# EAGLE board CT_schematic (EAGLE 7.6.0)

Size 100 x 80 mm. Coordinates in mm from the lower left corner, seen from the top.
Outline: 0,0 100,0 100,80 0,80 0,0
Copper layers (1*16): Top 0.035mm / dielectric 1.5mm / Bottom 0.035mm
Design rules "default": minimum track width 10mil, minimum drill 24mil, track to track 8mil, track to pad 8mil, pad to pad 8mil, via to via 8mil, smd to smd 8mil, copper to edge 40mil, drill to drill 8mil, minimum pad ring 10mil, minimum via ring 8mil, stop-mask expansion 4mil, vias tented up to drill 0mil, thermal gap 10mil

## Footprints (pad centres in the part's own frame; a part is rotated, then mirrored left to right if it is on the bottom)
C0603 = smd 0.8 x 0.8: 1 -0.762,0; 2 0.762,0
C0402 = smd 0.5 x 0.5: 1 -0.508,0; 2 0.508,0
C0805 = smd 1.2 x 1.3: 1 -1.016,0; 2 1.016,0
C1206 = smd 1.3 x 1.6: 1 -1.524,0; 2 1.524,0
DR1040 = smd 1.6 x 3.2: 1 -4.458,0; 2 4.458,0
R0603 = smd 0.8 x 0.8: 1 -0.762,0; 2 0.762,0
LQFP144 = smd 0.35 x 1.35: 1 -8.75,-10.625; 2 -8.25,-10.625; 3 -7.75,-10.625; 4 -7.25,-10.625; 5 -6.75,-10.625; 6 -6.25,-10.625; 7 -5.75,-10.625; 8 -5.25,-10.625; 9 -4.75,-10.625; 10 -4.25,-10.625; 11 -3.75,-10.625; 12 -3.25,-10.625; 13 -2.75,-10.62; 14 -2.25,-10.625; 15 -1.75,-10.625; 16 -1.25,-10.625; 17 -0.75,-10.625; 18 -0.25,-10.625; 19 0.25,-10.625; 20 0.75,-10.625; 21 1.25,-10.625; 22 1.75,-10.625; 23 2.25,-10.625; 24 2.75,-10.62; 25 3.25,-10.625; 26 3.75,-10.625; 27 4.25,-10.625; 28 4.75,-10.625; 29 5.25,-10.625; 30 5.75,-10.625; 31 6.25,-10.625; 32 6.75,-10.625; 33 7.25,-10.625; 34 7.75,-10.625; 35 8.25,-10.625; 36 8.75,-10.625; 73 8.75,10.625; 74 8.25,10.625; 75 7.75,10.625; 76 7.25,10.625; 77 6.75,10.625; 78 6.25,10.625; 79 5.75,10.625; 80 5.25,10.625; 81 4.75,10.625; 82 4.25,10.625; 83 3.75,10.625; 84 3.25,10.625; 85 2.75,10.625; 86 2.25,10.625; 87 1.75,10.625; 88 1.25,10.625; 89 0.75,10.625; 90 0.25,10.625; 91 -0.25,10.625; 92 -0.75,10.625; 93 -1.25,10.625; 94 -1.75,10.625; 95 -2.25,10.625; 96 -2.75,10.625; 97 -3.25,10.625; 98 -3.75,10.625; 99 -4.25,10.625; 100 -4.75,10.625; 101 -5.25,10.625; 102 -5.75,10.625; 103 -6.25,10.625; 104 -6.75,10.625; 105 -7.25,10.625; 106 -7.75,10.625; 107 -8.25,10.625; 108 -8.75,10.625 | smd 1.35 x 0.35: 37 10.625,-8.75; 38 10.625,-8.25; 39 10.625,-7.75; 40 10.625,-7.25; 41 10.625,-6.75; 42 10.625,-6.25; 43 10.625,-5.75; 44 10.625,-5.25; 45 10.625,-4.75; 46 10.625,-4.25; 47 10.625,-3.75; 48 10.625,-3.25; 49 10.625,-2.75; 50 10.625,-2.25; 51 10.625,-1.75; 52 10.625,-1.25; 53 10.625,-0.75; 54 10.625,-0.25; 55 10.625,0.25; 56 10.625,0.75; 57 10.625,1.25; 58 10.625,1.75; 59 10.625,2.25; 60 10.625,2.75; 61 10.625,3.25; 62 10.625,3.75; 63 10.625,4.25; 64 10.625,4.75; 65 10.625,5.25; 66 10.625,5.75; 67 10.625,6.25; 68 10.625,6.75; 69 10.625,7.25; 70 10.625,7.75; 71 10.625,8.25; 72 10.625,8.75; 109 -10.625,8.75; 110 -10.625,8.25; 111 -10.625,7.75; 112 -10.625,7.25; 113 -10.625,6.75; 114 -10.625,6.25; 115 -10.625,5.75; 116 -10.625,5.25; 117 -10.625,4.75; 118 -10.625,4.25; 119 -10.625,3.75; 120 -10.625,3.25; 121 -10.625,2.75; 122 -10.625,2.25; 123 -10.625,1.75; 124 -10.625,1.25; 125 -10.625,0.75; 126 -10.625,0.25; 127 -10.625,-0.25; 128 -10.625,-0.75; 129 -10.625,-1.25; 130 -10.625,-1.75; 131 -10.625,-2.25; 132 -10.625,-2.75; 133 -10.625,-3.25; 134 -10.625,-3.75; 135 -10.625,-4.25; 136 -10.625,-4.75; 137 -10.625,-5.25; 138 -10.625,-5.75; 139 -10.625,-6.25; 140 -10.625,-6.75; 141 -10.625,-7.25; 142 -10.625,-7.75; 143 -10.625,-8.25; 144 -10.625,-8.75
SOIC-8 = smd 1.6 x 0.6: 1 -2.7,1.905 | smd 1.55 x 0.6: 2 -2.7,0.635; 3 -2.7,-0.635; 4 -2.7,-1.905; 5 2.7,-1.905; 6 2.7,-0.635; 7 2.7,0.635; 8 2.7,1.905
SAMTEC_FTSH-105-01-L-DV-K = smd 0.762 x 2.794: 1 -2.54,-2.032; 2 -2.54,2.032; 3 -1.27,-2.032; 4 -1.27,2.032; 5 0,-2.032; 6 0,2.032; 7 1.27,-2.032; 8 1.27,2.032; 9 2.54,-2.032; 10 2.54,2.032
LGA-16 = smd 1.5 x 0.4: 1 -2.1,0.975; 2 -2.1,0.325; 3 -2.1,-0.325; 4 -2.1,-0.975; 9 2.1,-0.975; 10 2.1,-0.325; 11 2.1,0.325; 12 2.1,0.975 | smd 0.4 x 1.5: 5 -0.975,-2.1; 6 -0.325,-2.1; 7 0.325,-2.1; 8 0.975,-2.1; 13 0.975,2.1; 14 0.325,2.1; 15 -0.325,2.1; 16 -0.975,2.1
TDFN-8/6MM = smd 0.3 x 0.75: 1 0,0; 2 0.5,0; 3 1,0; 4 1.5,0; 5 1.5,3; 6 1,3; 7 0.5,3; 8 0,3
S25FL128SDSMFI000 = smd 0.5 x 1.6: 1 0,0; 2 1.27,0; 3 2.54,0; 4 3.81,0; 5 5.08,0; 6 6.35,0; 7 7.62,0; 8 8.89,0; 9 8.89,8.9; 10 7.62,8.9; 11 6.35,8.9; 12 5.08,8.9; 13 3.81,8.9; 14 2.54,8.9; 15 1.27,8.9; 16 0,8.9
SSOP-28 = smd 1.5 x 0.4: 1 -3.625,4.225; 2 -3.625,3.575; 3 -3.625,2.925; 4 -3.625,2.275; 5 -3.625,1.625; 6 -3.625,0.975; 7 -3.625,0.325; 8 -3.625,-0.325; 9 -3.625,-0.975; 10 -3.625,-1.625; 11 -3.625,-2.275; 12 -3.625,-2.925; 13 -3.625,-3.575; 14 -3.625,-4.225; 15 3.625,-4.225; 16 3.625,-3.575; 17 3.625,-2.925; 18 3.625,-2.275; 19 3.625,-1.625; 20 3.625,-0.975; 21 3.625,-0.325; 22 3.625,0.325; 23 3.625,0.975; 24 3.625,1.625; 25 3.625,2.275; 26 3.625,2.925; 27 3.625,3.575; 28 3.625,4.225
HTSS-105-01-G-D = drill 1 pad 1.8 square: 1 0,0 | drill 1 pad 1.8: 2 0,2.54; 3 2.54,0; 4 2.54,2.54; 5 5.08,0; 6 5.08,2.54; 7 7.62,0; 8 7.62,2.54; 9 10.16,0; 10 10.16,2.54
FCI_10118193-0001LF = smd 0.4 x 1.35: 1 -1.3,2.675; 2 -0.65,2.675; 3 0,2.675; 4 0.65,2.675; 5 1.3,2.675 | smd 1.6 x 1.4: 6 -3.2,2.45; 7 3.2,2.45 | smd 1.9 x 1.9: 8 -1.2,0; 9 1.2,0 | hole 0.5: -3.3,0; 3.3,0
SOT143B = smd 1 x 0.7: 1 -0.75,-1 | smd 0.6 x 0.7: 2 0.95,-1; 3 0.95,1; 4 -0.95,1
ASEK = smd 1.4 x 1: 1 -1.1,-0.8; 2 1.1,-0.8; 3 1.1,0.8; 4 -1.1,0.8
ASFL1 = smd 1.7 x 1.5: 1 -1.27,-1.1; 2 1.27,-1.1; 3 1.27,1.1; 4 -1.27,1.1
TSOT-23-5 = smd 1.3 x 0.62: 1 -1.31,0.95; 2 -1.31,0; 3 -1.31,-0.95; 4 1.31,-0.95; 5 1.31,0.95
DFN8_2X3MC = smd 0.813 x 0.305: 1 -1.398,0.75; 2 -1.398,0.25; 3 -1.398,-0.25; 4 -1.398,-0.75; 5 1.398,-0.75; 6 1.398,-0.25; 7 1.398,0.25; 8 1.398,0.75 | smd 1.753 x 1.549: 9 0,0
JST-2-SMD = smd 1 x 4.6: 1 -1,-3.7; 2 1,-3.7 | smd 1.6 x 3.4: NC1 -3.4,1.5; NC2 3.4,1.5
SON-6 = smd 0.55 x 0.3: 1 -0.355,0.5 | smd 0.52 x 0.3: 2 -0.37,0; 3 -0.37,-0.5; 4 0.37,-0.5; 5 0.37,0; 6 0.37,0.5
SW_4-1437565-2 = smd 1.4 x 2.1: 1 -2.23,4.55; 2 -2.23,-4.55; 3 2.23,4.55; 4 2.23,-4.55
LGM67K-G1J2-24-Z = smd 0.8 x 1.4: A -2,0; C 0,0
NC7SZ125M5X = smd 1.3 x 0.7: 1 -1.3,0.95; 2 -1.3,0; 3 -1.3,-0.95; 4 1.3,-0.95; 5 1.3,0.95

## Placement (x,y rotation side)
C1  1e-06  [C0603]  -46.99,71.12 0 top  (outside the outline)
C2  1e-07  [C0603]  -50.8,71.12 0 top  (outside the outline)
C3  1e-07  [C0603]  -54.61,71.12 0 top  (outside the outline)
C4  1e-07  [C0603]  -58.42,71.12 0 top  (outside the outline)
C5  1e-07  [C0603]  -62.23,71.12 0 top  (outside the outline)
C6  1e-07  [C0603]  -66.04,71.12 0 top  (outside the outline)
C7  1e-07  [C0603]  -69.85,71.12 0 top  (outside the outline)
C8  1e-07  [C0603]  -73.66,71.12 0 top  (outside the outline)
C9  1e-07  [C0603]  -77.47,71.12 0 top  (outside the outline)
C10  1e-07  [C0603]  -15.24,76.2 0 top  (outside the outline)
C11  1e-07  [C0603]  -19.05,76.2 0 top  (outside the outline)
C12  1e-07  [C0603]  -22.86,76.2 0 top  (outside the outline)
C13  1e-07  [C0603]  -26.67,76.2 0 top  (outside the outline)
C14  4.7e-06  [C0603]  -39.37,71.12 0 top  (outside the outline)
C15  1e-07  [C0603]  -30.48,76.2 0 top  (outside the outline)
C16  1e-07  [C0603]  -34.29,76.2 0 top  (outside the outline)
C17  1e-07  [C0603]  -38.1,76.2 0 top  (outside the outline)
C18  1e-08  [C0603]  -41.91,76.2 0 top  (outside the outline)
C19  1e-06  [C0603]  -45.72,76.2 0 top  (outside the outline)
C20  1e-08  [C0402]  -22.86,81.28 0 top  (outside the outline)
C21  1e-07  [C0402]  -26.67,81.28 0 top  (outside the outline)
C22  1e-08  [C0402]  -30.48,81.28 0 top  (outside the outline)
C23  1e-08  [C0402]  -34.29,81.28 0 top  (outside the outline)
C24  1e-08  [C0402]  -38.1,81.28 0 top  (outside the outline)
C25  4.7e-07  [C0603]  -43.18,71.12 0 top  (outside the outline)
C26  1e-08  [C0402]  -41.91,81.28 0 top  (outside the outline)
C27  1e-06  [C0603]  -49.53,76.2 0 top  (outside the outline)
C28  1e-06  [C0603]  -53.34,76.2 0 top  (outside the outline)
C29  1e-07  [C0402]  -45.72,81.28 0 top  (outside the outline)
C30  1e-07  [C0402]  -49.53,81.28 0 top  (outside the outline)
C31  1e-07  [C0402]  -53.34,81.28 0 top  (outside the outline)
C32  1e-07  [C0402]  -57.15,81.28 0 top  (outside the outline)
C33  1e-07  [C0402]  -60.96,81.28 0 top  (outside the outline)
C34  1e-08  [C0402]  -64.77,81.28 0 top  (outside the outline)
C35  1e-08  [C0402]  -68.58,81.28 0 top  (outside the outline)
C36  1e-05  [C0805]  -46.99,60.96 0 top  (outside the outline)
C37  1e-05  [C0805]  -52.07,60.96 0 top  (outside the outline)
C38  1e-07  [C0402]  -72.39,81.28 0 top  (outside the outline)
C39  1e-05  [C1206]  -16.51,60.96 0 top  (outside the outline)
C40  1e-05  [C1206]  -22.86,60.96 0 top  (outside the outline)
C41  1e-08  [C0402]  -76.2,81.28 0 top  (outside the outline)
C42  1e-08  [C0402]  -80.01,81.28 0 top  (outside the outline)
C43  1e-08  [C0402]  -15.24,86.36 0 top  (outside the outline)
I1  2.5e-06  [DR1040]  -67.31,29.21 0 top  (outside the outline)
R2  1000.0  [R0603]  -57.15,76.2 0 top  (outside the outline)
R4  4700.0  [R0603]  -60.96,76.2 0 top  (outside the outline)
R5  4700.0  [R0603]  -64.77,76.2 0 top  (outside the outline)
R6  2200.0  [R0603]  -68.58,76.2 0 top  (outside the outline)
R7  2200.0  [R0603]  -72.39,76.2 0 top  (outside the outline)
R8  10000.0  [R0603]  -25.4,66.04 0 top  (outside the outline)
R9  10000.0  [R0603]  -30.48,66.04 0 top  (outside the outline)
R10  10000.0  [R0603]  -35.56,66.04 0 top  (outside the outline)
R11  10000.0  [R0603]  -40.64,66.04 0 top  (outside the outline)
R12  10000.0  [R0603]  -45.72,66.04 0 top  (outside the outline)
R13  10000.0  [R0603]  -50.8,66.04 0 top  (outside the outline)
R14  10000.0  [R0603]  -55.88,66.04 0 top  (outside the outline)
R15  10000.0  [R0603]  -60.96,66.04 0 top  (outside the outline)
R16  5.0  [R0603]  -76.2,76.2 0 top  (outside the outline)
R17  10000.0  [R0603]  -66.04,66.04 0 top  (outside the outline)
R18  10000.0  [R0603]  -71.12,66.04 0 top  (outside the outline)
R19  10000.0  [R0603]  -76.2,66.04 0 top  (outside the outline)
R20  10000.0  [R0603]  -15.24,71.12 0 top  (outside the outline)
R21  10000.0  [R0603]  -20.32,71.12 0 top  (outside the outline)
R22  100000.0  [R0603]  -69.85,59.69 0 top  (outside the outline)
R23  220000.0  [R0603]  -74.93,59.69 0 top  (outside the outline)
R24  1000000.0  [R0603]  -64.77,59.69 0 top  (outside the outline)
R25  10000.0  [R0603]  -25.4,71.12 0 top  (outside the outline)
R26  10000.0  [R0603]  -30.48,71.12 0 top  (outside the outline)
R27  9100.0  [R0603]  -15.24,81.28 0 top  (outside the outline)
R28  680000.0  [R0603]  -15.24,66.04 0 top  (outside the outline)
R29  120000.0  [R0603]  -20.32,66.04 0 top  (outside the outline)
R30  2000.0  [R0603]  -19.05,81.28 0 top  (outside the outline)
R31  10000.0  [R0603]  -35.56,71.12 0 top  (outside the outline)
U1  STM32L476ZGT6  [LQFP144]  -24.13,11.43 0 top  (outside the outline)
U2  AT25020B-SSHL-T  [SOIC-8]  -71.12,41.91 0 top  (outside the outline)
U3  FTSH-105-01-L-DV-K  [SAMTEC_FTSH-105-01-L-DV-K]  -35.56,30.48 0 top  (outside the outline)
U4  l3g4200d  [LGA-16]  -63.5,52.07 0 top  (outside the outline)
U5  24AA16-I/MC  [TDFN-8/6MM]  -55.88,41.91 0 top  (outside the outline)
U6  S25FL128SDSMFI000  [S25FL128SDSMFI000]  -54.61,3.81 0 top  (outside the outline)
U7  ST3241EBPR  [SSOP-28]  -62.23,7.62 0 top  (outside the outline)
U8  HTSS-105-01-G-D  [HTSS-105-01-G-D]  -43.18,41.91 0 top  (outside the outline)
U9  10118193-0001LF  [FCI_10118193-0001LF]  -35.56,52.07 0 top  (outside the outline)
U10  prtr5v0u2ax  [SOT143B]  -27.94,86.36 0 top  (outside the outline)
U11  ASEK-32.768KHz-ECST  [ASEK]  -57.15,53.34 0 top  (outside the outline)
U12  ASFL1-25MHZ-NCS  [ASFL1]  -26.67,53.34 0 top  (outside the outline)
U13  ltc3406es5  [TSOT-23-5]  -57.15,59.69 0 top  (outside the outline)
U14  MCP73831T-2ACI/MC  [DFN8_2X3MC]  -38.1,85.09 0 top  (outside the outline)
U15  S2B-PH-SM4-TB(LF)(SN)  [JST-2-SMD]  -22.86,44.45 0 top  (outside the outline)
U16  TPS3895ADRYR  [SON-6]  -31.75,85.09 0 top  (outside the outline)
U17  4-1437565-2  [SW_4-1437565-2]  -57.15,29.21 0 top  (outside the outline)
U18  Q65110A2395  [LGM67K-G1J2-24-Z]  -71.12,52.07 0 top  (outside the outline)
U19  nc7sz125m5x  [NC7SZ125M5X]  -27.94,59.69 0 top  (outside the outline)
U20  nc7sz125m5x  [NC7SZ125M5X]  -34.29,59.69 0 top  (outside the outline)
U21  nc7sz125m5x  [NC7SZ125M5X]  -40.64,59.69 0 top  (outside the outline)

## Library data of the parts
C1-C43 I1 R2 R4-R31 U1-U21 = circuit_tree

## Nets
CLK_U1_8: U1.8 U11.3
CLK_U1_23: U1.23 U12.3
GND: C1.2 C2.2 C3.2 C4.2 C5.2 C6.2 C7.2 C8.2 C9.2 C10.2 C11.2 C12.2 C13.2 C14.2 C15.2 C16.2 C17.2 C18.2 C19.2 C20.2 C21.2 C22.2 C23.2 C24.2 C26.2 C27.2 C28.2 C29.2 C32.2 C33.2 C34.2 C35.2 C36.2 C37.1 C37.2 C38.2 C39.2 C40.2 C41.2 C42.2 C43.2 R2.2 R8.2 R15.2 R16.2 R17.1 R17.2 R23.2 R27.2 R29.2 R30.2 U1.16 U1.30 U1.31 U1.38 U1.51 U1.61 U1.71 U1.83 U1.94 U1.107 U1.120 U1.130 U1.143 U2.4 U3.3 U3.5 U4.8 U4.9 U4.10 U4.11 U4.12 U4.13 U5.4 U5.7 U6.10 U7.23 U7.25 U8.9 U9.5 U9.6 U9.7 U9.8 U9.9 U10.1 U11.2 U12.2 U13.2 U14.6 U14.9 U15.2 U16.2 U18.C U19.2 U19.3 U20.1 U20.3 U21.1 U21.3
INPUT_USBPOWER_5V: C39.1 R31.2 U9.1 U10.4 U14.1 U14.2
NET_U1_25: R5.1 U1.25 U21.4
NET_U1_128: R7.1 U1.128 U5.5
NET_U1_129: R6.1 U1.129 U5.6
NET_U1_138: R8.1 U1.138
NET_U1_141: U18.A
NET_U1_142: U17.3 U17.4
NET_U2_3: R9.1 U2.3
NET_U2_7: R11.1 U2.7
NET_U3_9: R16.1 U3.9
NET_U4_14: C24.1 C25.1 U4.14
NET_U4_ATNET_1: C25.2
NET_U6_3: R4.1 U6.3 U20.4
NET_U7_1: C31.1 U7.1
NET_U7_2: C31.2 U7.2
NET_U7_3: C33.1 U7.3
NET_U7_22: R22.1 U7.22
NET_U7_24: C30.2 U7.24
NET_U7_27: C32.1 U7.27
NET_U7_28: C30.1 U7.28
NET_U8_3: U7.4 U8.3
NET_U8_4: U7.5 U8.4
NET_U8_5: U7.9 U8.5
NET_U8_6: U7.10 U8.6
NET_U13_1: U13.1
NET_U13_3: I1.1 U13.3
NET_U13_5: R23.1 R24.1 U13.5
NET_U13_ATNET_3: I1.2 R24.2
NET_U14_5: R31.1 U14.5
NET_U14_8: R30.1 U14.8
NET_U16_1: R26.1 R27.1 U16.1
NET_U16_3: R28.2 R29.1 U16.3
NET_U16_4: R25.1 U16.4 U19.4 U20.2 U21.2
NET_U17_1: R2.1 U17.1 U17.2
PROC_LPUART1_CTS: U1.74 U7.13
PROC_LPUART1_RTS: U1.73 U7.18
PROC_LPUART1_RX: U1.26 U7.19
PROC_LPUART1_TX: U1.27 U7.14
PROC_QUADSPI_BK1_IO0: U1.47 U6.15
PROC_QUADSPI_BK1_IO1: U1.46 U6.8
PROC_QUADSPI_BK1_IO2: R20.1 U1.43 U6.9
PROC_QUADSPI_BK1_IO3: R21.1 U1.42 U6.1
PROC_QUADSPI_CLK: U1.63 U6.16
PROC_QUADSPI_NCS: R19.1 U1.64 U6.7
PROC_SPI1_MISO: U1.67 U4.4
PROC_SPI1_MOSI: U1.68 U4.3
PROC_SPI1_NSS: R18.1 U1.40 U4.5
PROC_SPI1_SCK: U1.41 U4.2
PROC_SPI2_MISO: U1.28 U2.2
PROC_SPI2_MOSI: U1.29 U2.5
PROC_SPI2_NSS: R10.1 U1.114 U2.1
PROC_SPI2_SCK: U1.69 U2.6
PROC_SYS_JTCK_SWCLK: R15.1 U1.109 U3.4
PROC_SYS_JTDI: R13.1 U1.110 U3.8
PROC_SYS_JTDO_SWO: U1.133 U3.6
PROC_SYS_JTMS_SWDIO: R14.1 U1.105 U3.2
PROC_USB_OTG_FS_DM: U9.2 U10.3
PROC_USB_OTG_FS_DP: U9.3 U10.2
RST_OUT_U3_JTAG_RST_B: R12.1 U3.10 U19.1
VCC_S1_3V7: C36.1 C40.1 U13.4 U14.3 U14.4 U15.1
VCC_TIER1_3V3: C1.1 C2.1 C3.1 C4.1 C5.1 C6.1 C7.1 C8.1 C9.1 C10.1 C11.1 C12.1 C13.1 C14.1 C15.1 C16.1 C17.1 C18.1 C19.1 C20.1 C21.1 C22.1 C23.1 C26.1 C27.1 C28.1 C29.1 C34.1 C35.1 C37.2 C38.1 C41.1 C42.1 C43.1 I1.2 R4.2 R5.2 R6.2 R7.2 R9.2 R10.2 R11.2 R12.2 R13.2 R14.2 R18.2 R19.2 R20.2 R21.2 R22.2 R24.2 R25.2 R26.2 R28.1 U1.6 U1.17 U1.32 U1.33 U1.39 U1.52 U1.62 U1.72 U1.84 U1.95 U1.106 U1.108 U1.121 U1.131 U1.144 U2.8 U3.1 U4.1 U4.15 U4.16 U5.8 U6.2 U6.14 U7.26 U11.4 U12.4 U16.6 U19.5 U20.5 U21.5

## Tracks (layer width: path | path; a pad name or v marks a point on that pad's centre or on a via)
CLK_U1_8  (1 unrouted)
CLK_U1_23  (1 unrouted)
GND  (98 unrouted)
INPUT_USBPOWER_5V  (5 unrouted)
NET_U1_25  (2 unrouted)
NET_U1_128  (2 unrouted)
NET_U1_129  (2 unrouted)
NET_U1_138  (1 unrouted)
NET_U1_142  (1 unrouted)
NET_U2_3  (1 unrouted)
NET_U2_7  (1 unrouted)
NET_U3_9  (1 unrouted)
NET_U4_14  (2 unrouted)
NET_U6_3  (2 unrouted)
NET_U7_1  (1 unrouted)
NET_U7_2  (1 unrouted)
NET_U7_3  (1 unrouted)
NET_U7_22  (1 unrouted)
NET_U7_24  (1 unrouted)
NET_U7_27  (1 unrouted)
NET_U7_28  (1 unrouted)
NET_U8_3  (1 unrouted)
NET_U8_4  (1 unrouted)
NET_U8_5  (1 unrouted)
NET_U8_6  (1 unrouted)
NET_U13_3  (1 unrouted)
NET_U13_5  (2 unrouted)
NET_U13_ATNET_3  (1 unrouted)
NET_U14_5  (1 unrouted)
NET_U14_8  (1 unrouted)
NET_U16_1  (2 unrouted)
NET_U16_3  (2 unrouted)
NET_U16_4  (4 unrouted)
NET_U17_1  (2 unrouted)
PROC_LPUART1_CTS  (1 unrouted)
PROC_LPUART1_RTS  (1 unrouted)
PROC_LPUART1_RX  (1 unrouted)
PROC_LPUART1_TX  (1 unrouted)
PROC_QUADSPI_BK1_IO0  (1 unrouted)
PROC_QUADSPI_BK1_IO1  (1 unrouted)
PROC_QUADSPI_BK1_IO2  (2 unrouted)
PROC_QUADSPI_BK1_IO3  (2 unrouted)
PROC_QUADSPI_CLK  (1 unrouted)
PROC_QUADSPI_NCS  (2 unrouted)
PROC_SPI1_MISO  (1 unrouted)
PROC_SPI1_MOSI  (1 unrouted)
PROC_SPI1_NSS  (2 unrouted)
PROC_SPI1_SCK  (1 unrouted)
PROC_SPI2_MISO  (1 unrouted)
PROC_SPI2_MOSI  (1 unrouted)
PROC_SPI2_NSS  (2 unrouted)
PROC_SPI2_SCK  (1 unrouted)
PROC_SYS_JTCK_SWCLK  (2 unrouted)
PROC_SYS_JTDI  (2 unrouted)
PROC_SYS_JTDO_SWO  (1 unrouted)
PROC_SYS_JTMS_SWDIO  (2 unrouted)
PROC_USB_OTG_FS_DM  (1 unrouted)
PROC_USB_OTG_FS_DP  (1 unrouted)
RST_OUT_U3_JTAG_RST_B  (2 unrouted)
VCC_S1_3V7  (5 unrouted)
VCC_TIER1_3V3  (83 unrouted)